# Altium PCB SurfaceDial_V1.2.1.PcbDoc
Units mm, origin at the board's own origin, x right, y up, seen from the top; angles counter-clockwise.
Board outline 44.2 x 43.65 mm, 2 copper layers (Top Layer, Bottom Layer); 22 components, 18 nets, 97 pads, 26 vias.
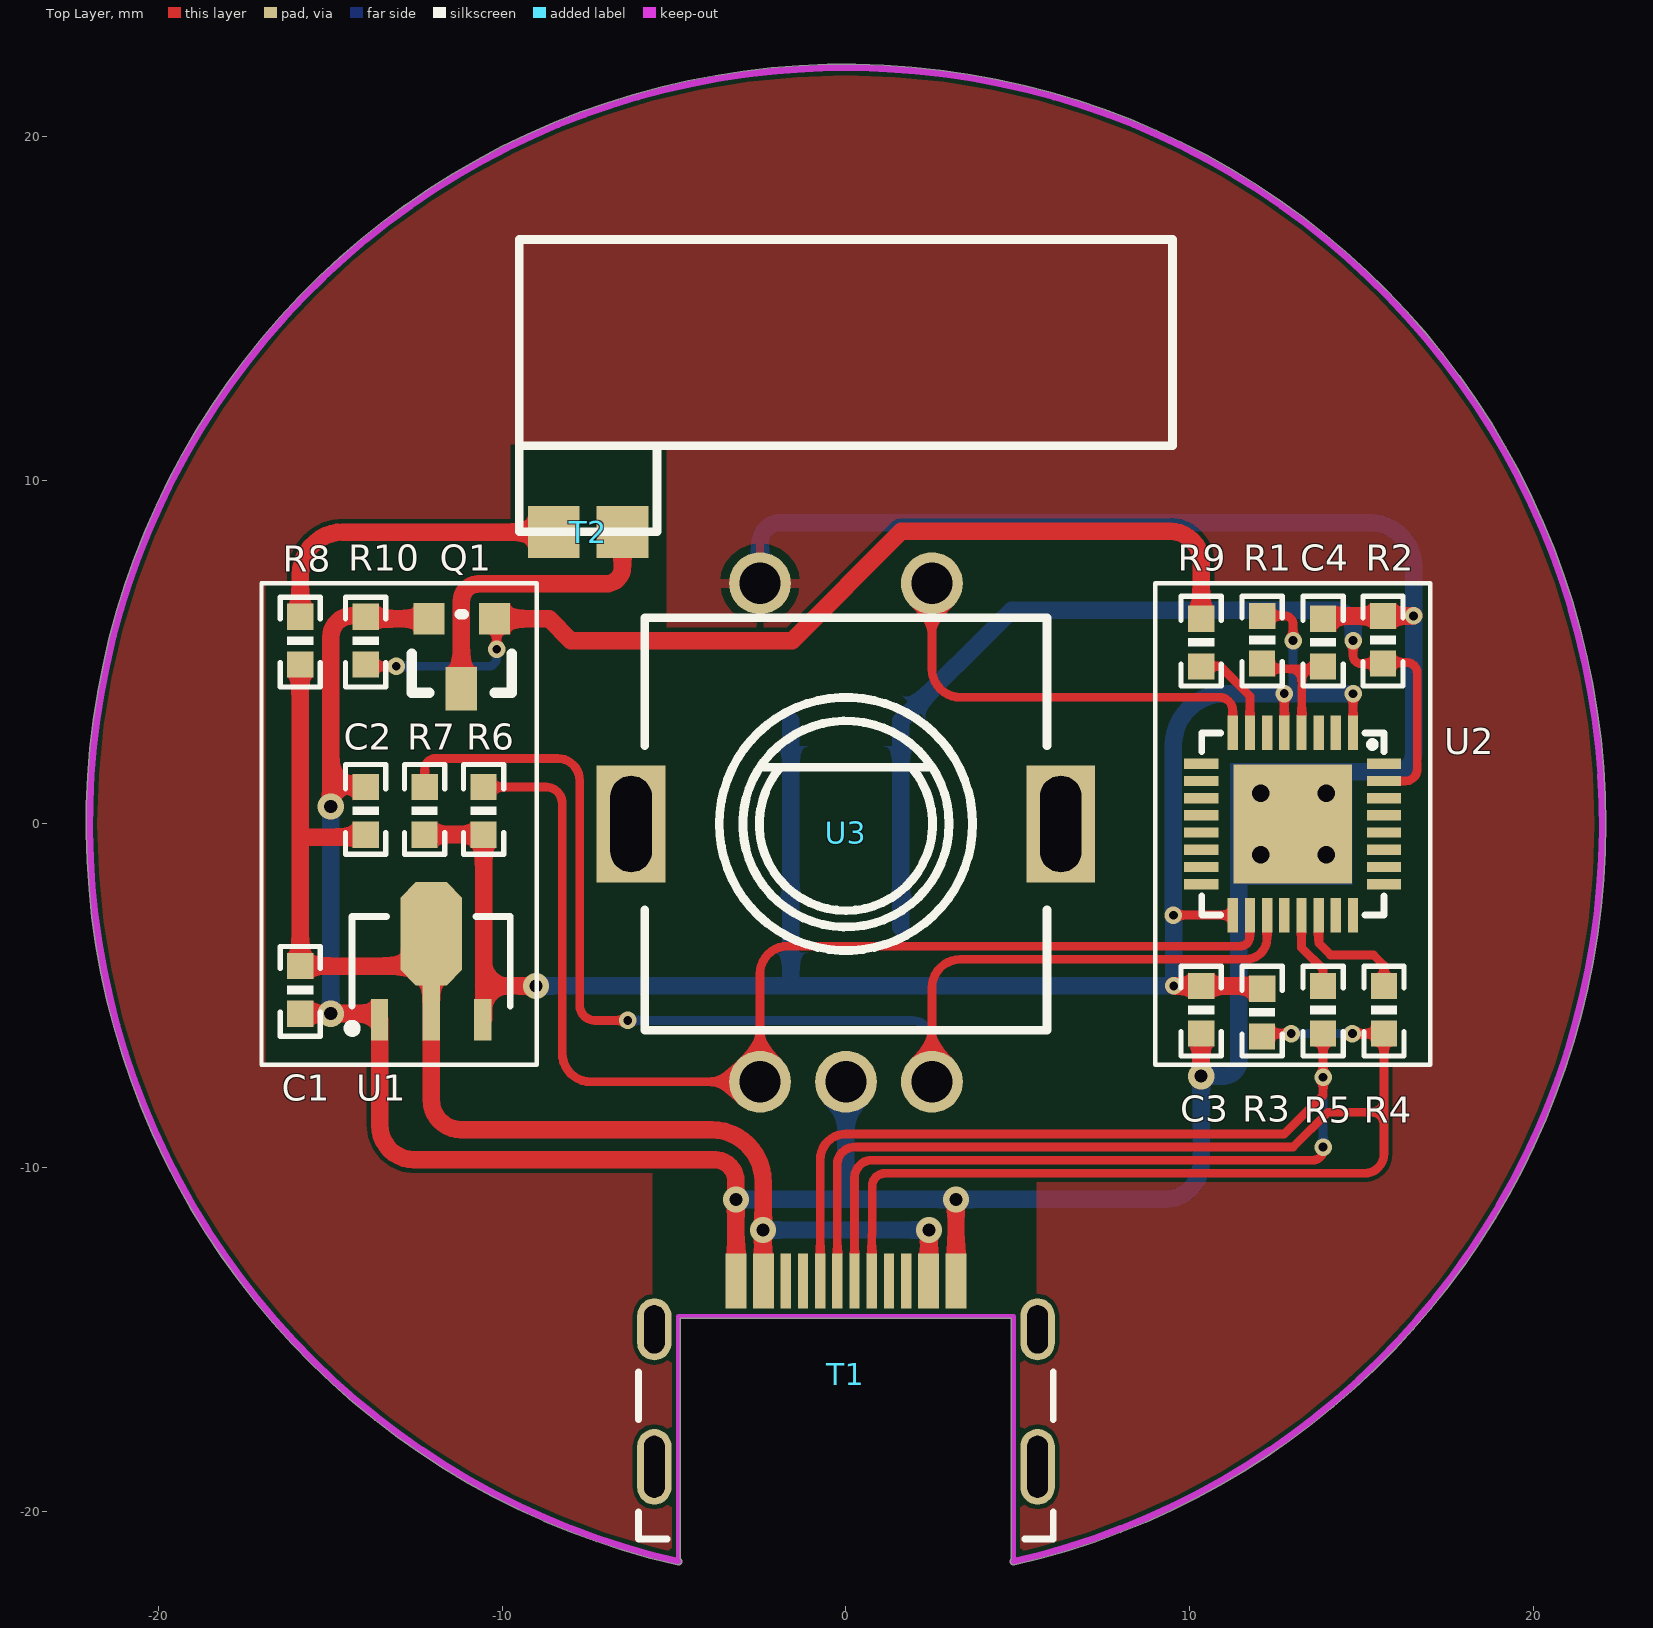
[diagram p0: Top Layer view]
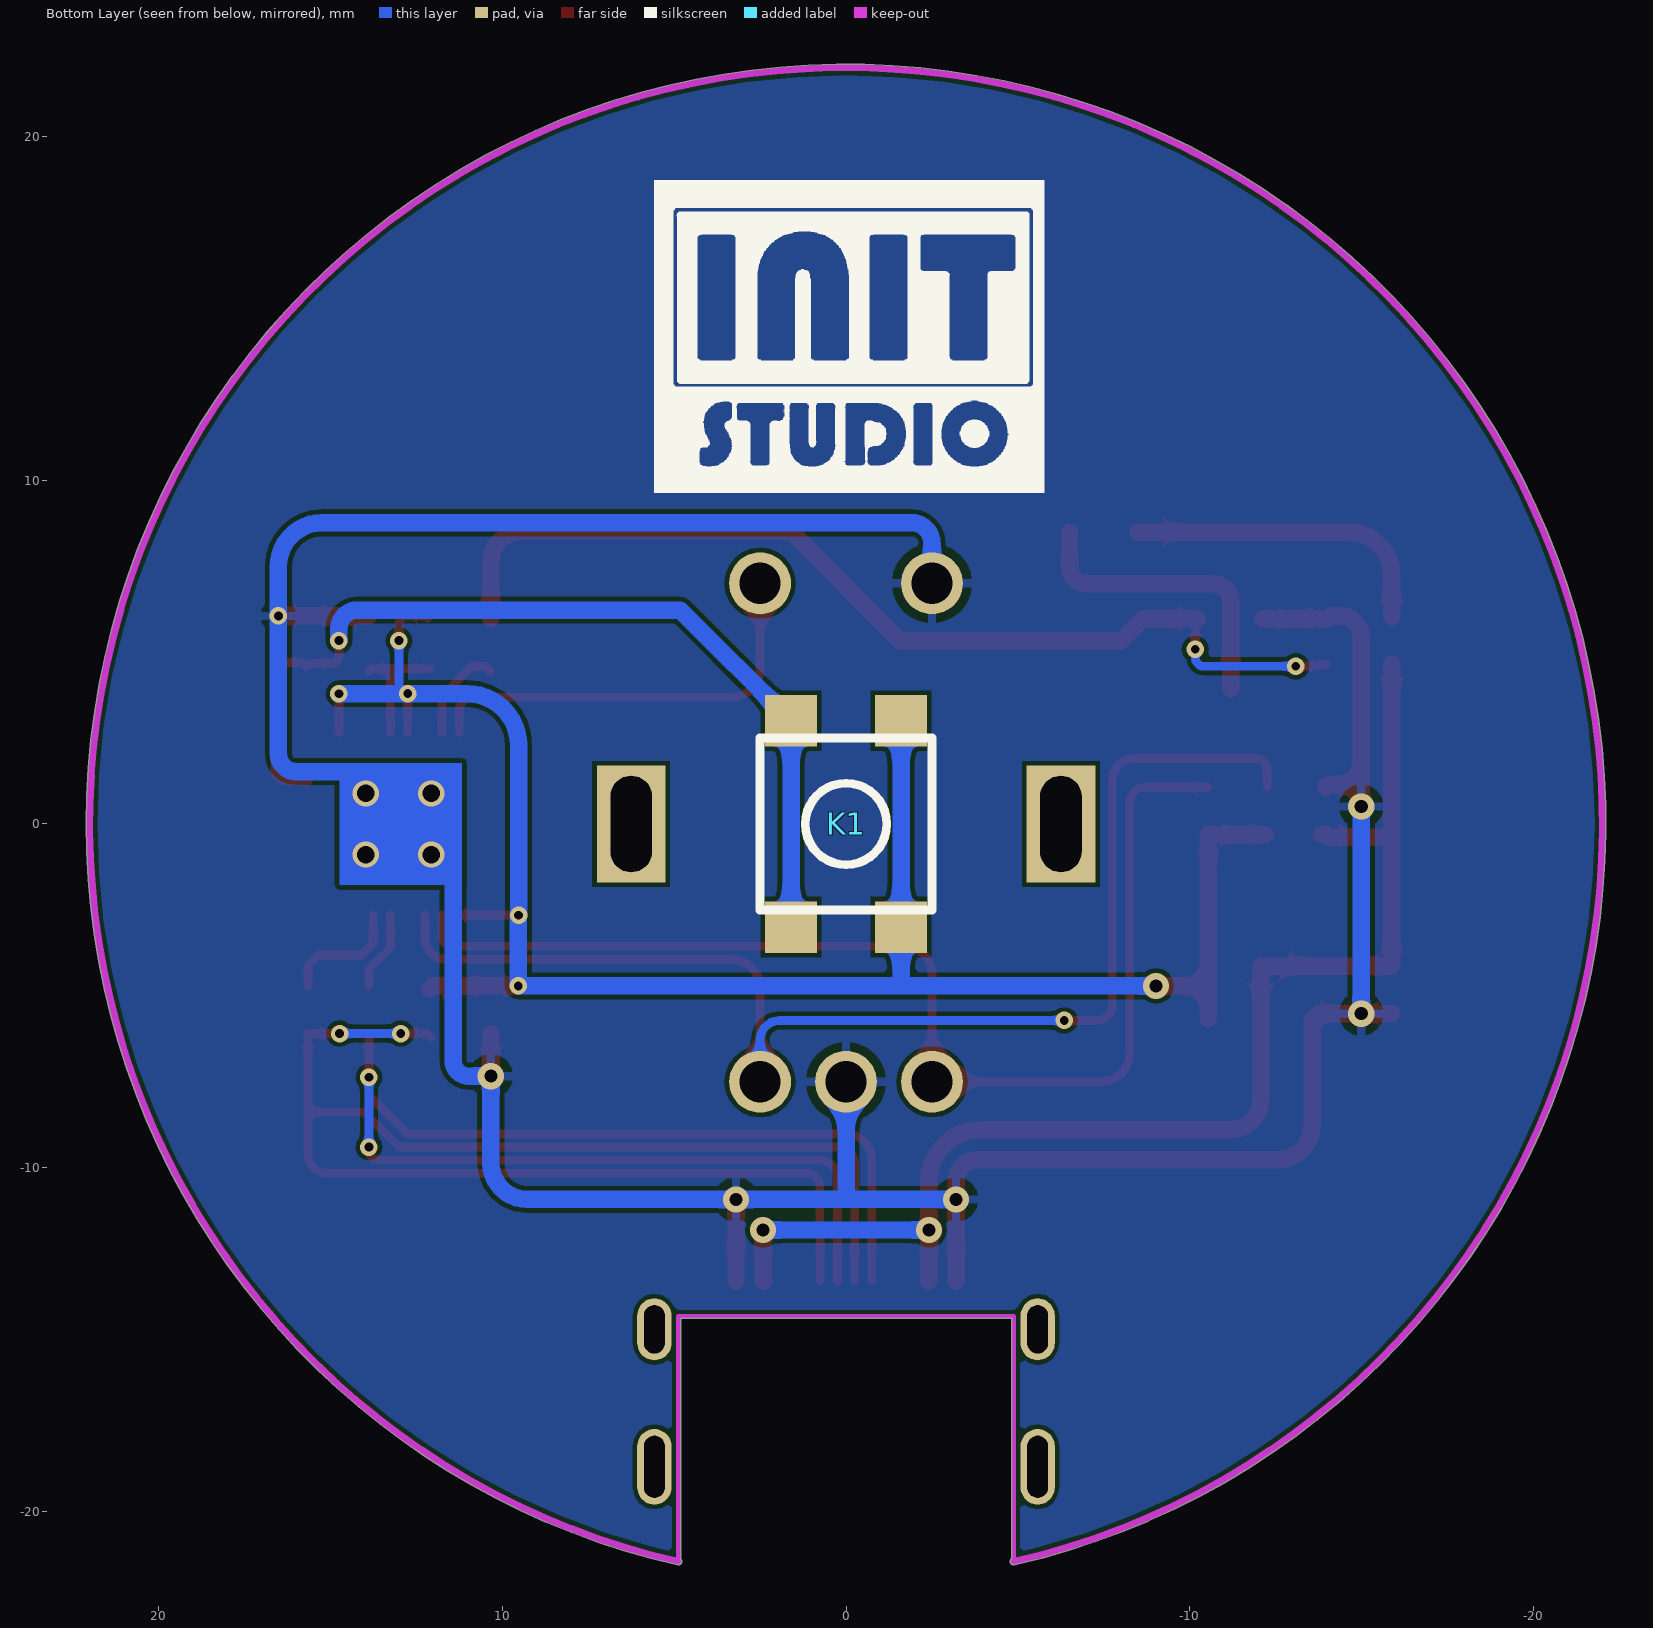
[diagram p1: Bottom Layer view, seen from below]
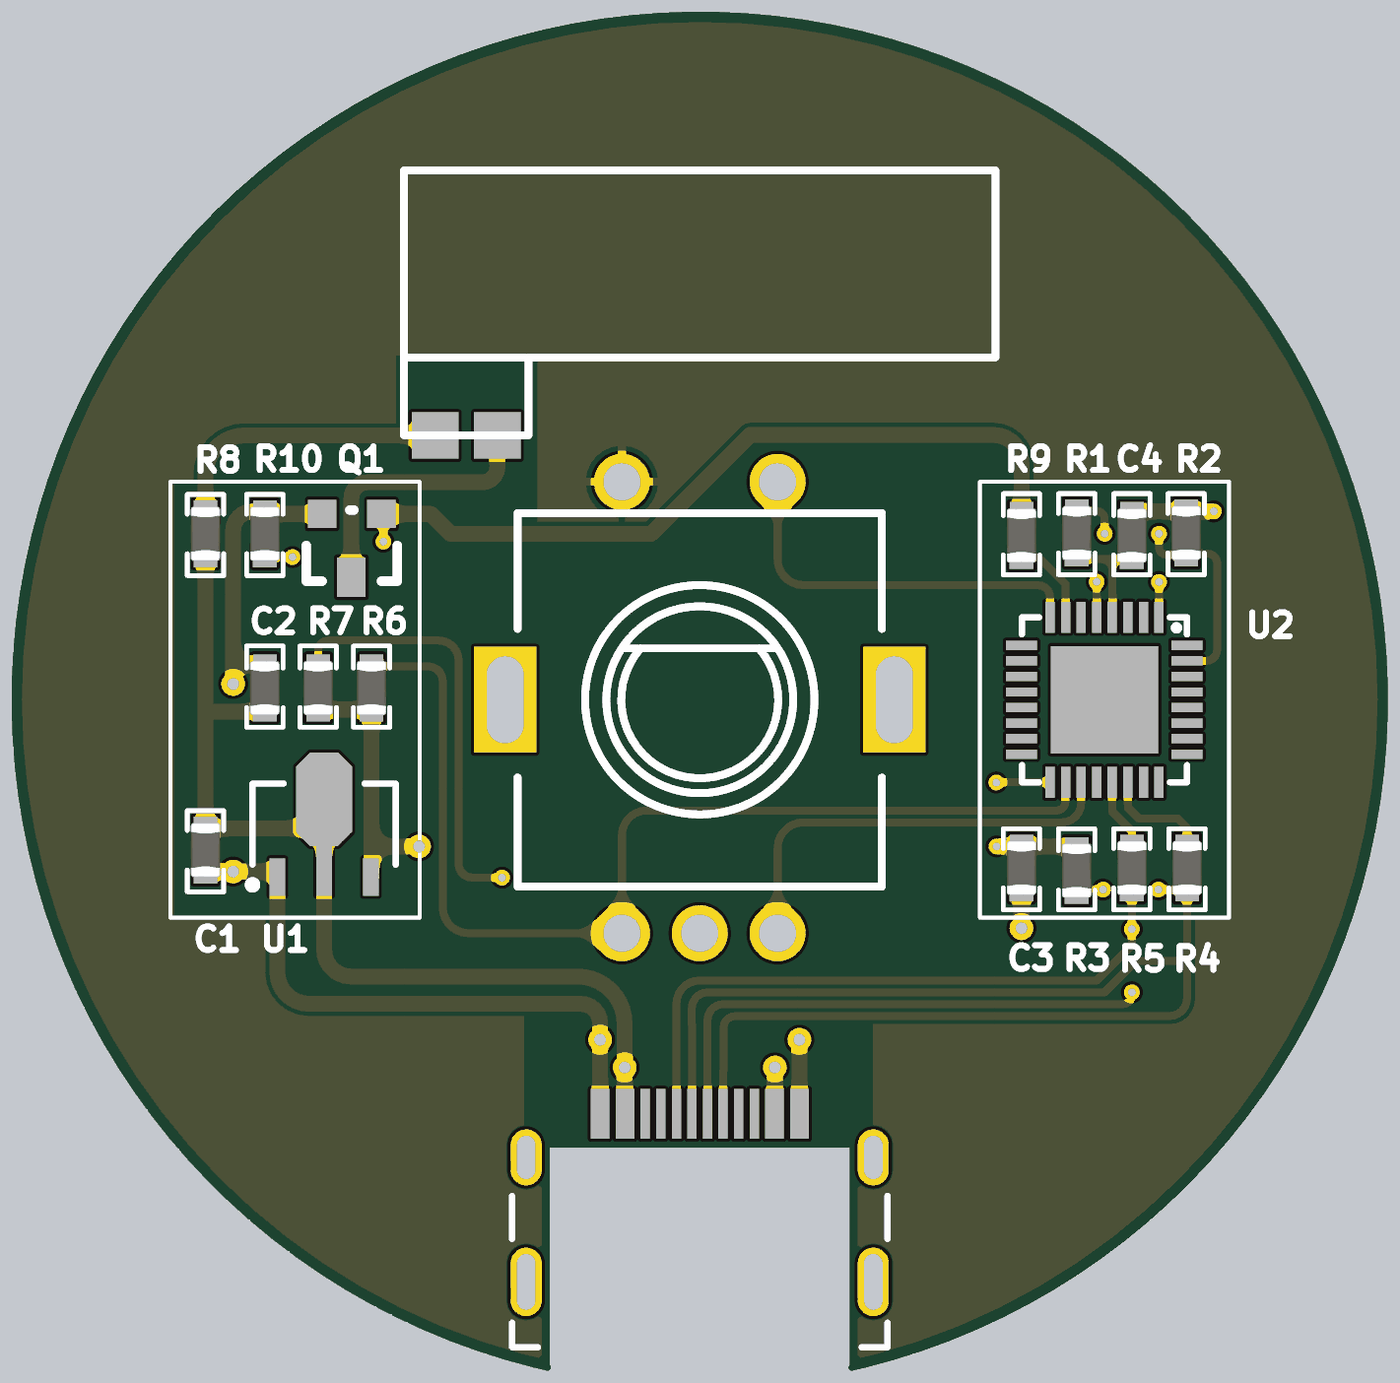
[diagram p2: 3D render of the assembled board from above, using the file's embedded part models]

## Layer stack, top to bottom
Top Solder: solder mask 0.0102, Solder Resist, Dk 3.5
Top Layer: signal copper 0.0356
Dielectric 1: dielectric 0.32, FR-4, Dk 4.8
Bottom Layer: signal copper 0.0356
Bottom Solder: solder mask 0.0102, Solder Resist, Dk 3.5

## Board outline
-4.901,-21.55 ccw(c-4.878,-21.452) -4.778,-21.452 ccw(c-4.878,-21.452) -4.815,-21.375 -4.815,-14.383 4.815,-14.383 4.815,-21.375 ccw(c4.878,-21.452) 4.901,-21.55 ccw(c0,0) 22.1,0 ccw(c0,0)

## Design rules (kind name [scope] priority, off if disabled: settings)
Clearance [All] p1: gap=0.127 ignorepadtopadclearanceinfootprint=FALSE
HoleSize [All] p1: absolutevalues=TRUE maxlimit=3 minlimit=0.025 maxpercent=80.000 minpercent=20.000
MinimumSolderMaskSliver [All] p1: minsoldermaskwidth=0.102
PolygonConnect [All] p1: connectstyle=Relief reliefconductorwidth=0.254 reliefentries=4 polygonreliefangle="90 Angle" airgapwidth=0.254
RoutingVias [All] p1: holewidth=0.254 width=0.508 viastyle="Through Hole" minholewidth=0.254 minwidth=0.508 maxholewidth=0.254 maxwidth=0.508
SilkToSilkClearance [All] p1: silktosilkclearance=0.127
SilkToSolderMaskClearance [IsPad] p1: minsilkscreentomaskgap=0.127 clearancetoexposedcopper=TRUE
SolderMaskExpansion [All] p1: expansion=0.102
Width [All] p1: maxlimit=2 minlimit=0.127 preferedwidth=0.254
26 further rules are at their usual default settings.

## Components (designator, comment, footprint, x,y, rotation, side; value= is the part's Value field where it differs from the comment)
C1 "CAP_0603" 0603 -15.875,-4.826 r90 top value=104
C2 "CAP_0603" 0603 -13.97,0.381 r270 top value=104
C3 "CAP_0603" 0603 10.333,-5.404 r90 top value=104
C4 "CAP_0603" 0603 13.878,5.277 r270 top value=104
Designator28 "Comment" "INIT - DUPLICATE" 92.202,88.773 r0 bottom
K1 "KEY" SW(5*5) 0,0 r180 bottom
Q1 "NPN" SOT-23 -11.176,4.953 r180 top
R1 "RES_0603" 0603 12.105,5.359 r90 top value=10K
R2 "RES_0603" 0603 15.621,5.359 r90 top value=10K
R3 "RES_0603" 0603 12.105,-5.486 r270 top value=1.5K
R4 "RES_0603" 0603 15.65,-5.404 r90 top value=22R
R5 "RES_0603" 0603 13.878,-5.404 r90 top value=22R
R6 "RES_0603" 0603 -10.541,0.381 r270 top value=10K
R7 "RES_0603" 0603 -12.255,0.381 r270 top value=10K
R8 "RES_0603" 0603 -15.875,5.334 r90 top value="0.5A 6V"
R9 "RES_0603" 0603 10.333,5.277 r270 top value=1K
R10 "RES_0603" 0603 -13.97,5.334 r90 top value=10K
T1 "Type-C16" "TYPE_C16 沉板" 0,-16 r0 top
T2 "电机触盘" MEIZU_M 0,14 r0 top
U1 "SGM2200-3.3YK3G" SOT-89-3 -12.065,-4.445 r90 top
U2 "STM32F042K6U6" UFQFPN32 13,0 r270 top
U3 "EC11" EC11E1820402 0,0 r0 top

## Footprints (in the part's own frame and the unit in brackets; to place one, negate y for a bottom-side part, rotate by r counter-clockwise, add the part's x,y. Pads: shape width x height; smd on the part's side, far side on the other; paste and mask are expansions set on the pad)
0603 [mil]
  rect 30x30 smd: 1(-27.25,0.03) 2(27.25,-0.03)
  silkscreen extent -53,-23 50,23, body extent -34,-19 34,19, height 35
EC11E1820402 [mm]
  rect 2x3.4 hole 1.2 slot 2.8 at 90 deg: 0(-6.25,0) 0(6.25,0)
  round 1.8 hole 1.2: 1(-2.5,-7.5) 2(0,-7.5) 3(2.5,-7.5) 4(2.5,7) 5(-2.5,7)
  silkscreen extent -5.85,-6 5.85,6
"INIT - DUPLICATE" [mm]
  silkscreen extent -97.97,70.06 -86.62,79.14
MEIZU_M [mm]
  rect 1.5x1.5 smd: 1(-8.5,-5.508) 2(-6.5,-5.508)
  silkscreen extent -9.5,-5.5 9.5,3, body extent -9.51,-5.49 9.51,3, height 3
SOT-23 [mil]
  rect 36x36 smd: 1(-37.5,-40) 2(37.5,-40)
  rect 36x50 smd: 3(0.5,40)
  silkscreen extent -58,-45 58,45, body extent -58,-25 60,45, height 43
SOT-89-3 [mm]
  rect 1.2x0.5 smd: 1(-1.25,1.5) 3(-1.25,-1.5)
  rect 1.6x0.5 smd: 2(-1.05,0)
  oct 3x1.8 smd: 2(1.25,0)
  silkscreen extent -1.62,-2.3 1.75,2.42, body extent -0.85,-2.3 1.75,2.3, height 1.6
SW(5*5) [mm]
  rect 1.5x1.5 smd: 1(-1.6,-3) 1(-1.6,3) 2(1.6,-3) 2(1.6,3)
  silkscreen extent -2.5,-2.5 2.5,2.5, body extent -2.57,-2.56 2.51,2.51, height 0.51
"TYPE_C16 沉板" [mm] "16pin"
  oval 1x2.2 hole 0.6 slot 1.8 at 90 deg: 0(-5.575,-2.7) 0(5.575,-2.7)
  oval 1x1.8 hole 0.6 slot 1.4 at 90 deg: 0(-5.575,1.3) 0(5.575,1.3)
  rect 0.6x1.6 smd: 1(3.2,2.7) 2(2.4,2.7) 11(-2.4,2.7) 12(-3.2,2.7)
  rect 0.3x1.6 smd: 3(1.75,2.7) 4(1.25,2.7) 5(0.75,2.7) 6(0.25,2.7) 7(-0.25,2.7) 8(-0.75,2.7) 9(-1.25,2.7) 10(-1.75,2.7)
  silkscreen extent -6.03,-4.8 6.03,0.06
UFQFPN32 [mm]
  rect 3.45x3.45 smd: 0(0,0)
  rect 1x0.3 smd: 1(-2.65,1.75) 2(-2.65,1.25) 3(-2.65,0.75) 4(-2.65,0.25) 5(-2.65,-0.25) 6(-2.65,-0.75) 7(-2.65,-1.25) 8(-2.65,-1.75) 17(2.65,-1.75) 18(2.65,-1.25) 19(2.65,-0.75) 20(2.65,-0.25) 21(2.65,0.25) 22(2.65,0.75) 23(2.65,1.25) 24(2.65,1.75)
  rect 0.3x1 smd: 9(-1.75,-2.667) 10(-1.25,-2.667) 11(-0.75,-2.667) 12(-0.25,-2.667) 13(0.25,-2.667) 14(0.75,-2.667) 15(1.25,-2.667) 16(1.75,-2.667) 25(1.75,2.65) 26(1.25,2.65) 27(0.75,2.65) 28(0.25,2.65) 29(-0.25,2.65) 30(-0.75,2.65) 31(-1.25,2.65) 32(-1.75,2.65)
  silkscreen extent -2.65,-2.65 2.65,2.65, body extent -2.64,-2.64 2.64,2.64, height 0.25

## Part data
C1 C2 C3 C4 R1 R2 R3 R4 R5 R6 R7 R8 R9 R10: Package=SMT

## Via types
v1: diameter 0.508, hole 0.254, Top Layer to Bottom Layer, 14 vias
v2: diameter 0.762, hole 0.381, Top Layer to Bottom Layer, 8 vias
v3: diameter 0.762, hole 0.508, Top Layer to Bottom Layer, 4 vias

## Nets (pads, with @x,y where several pads share a name; then routed paths per layer and width w, separated by ;. In a path a pad name is that pad's centre, name@x,y a point inside that pad or via, vN(x,y) a via of type N, cw(c..) or ccw(c..) an arc to the next point about the centre after c; other vN are vias at no path point)
EC_A: R6.1 U2.18 U3.1 | length 34.7
  Top Layer w0.254: R6.1 -8.724,1.073 cw(c-8.724,0.604) -8.255,0.604 -8.255,-6.665 ccw(c-7.42,-6.665) -7.42,-7.5 U3.1 -2.5,-4.354 cw(c-1.702,-4.354) -1.702,-3.556 11.47,-3.556 ccw(c11.47,-3.284) 11.742,-3.284 11.742,-2.658 U2.18
EC_B: R7.1 U2.19 U3.3 | length 38.1
  Top Layer w0.254: R7.1 -12.255,1.588 cw(c-11.938,1.588) -11.938,1.905 -8.382,1.905 cw(c-8.382,1.27) -7.747,1.27 -7.747,-5.27 ccw(c-7.302,-5.27) -7.302,-5.715 v1(-6.35,-5.715) ; U3.3 2.5,-4.768 cw(c3.331,-4.768) 3.331,-3.937 11.631,-3.937 ccw(c11.631,-3.318) 12.25,-3.318 U2.19
  Bottom Layer w0.254: v1(-6.35,-5.715) 1.926,-5.715 cw(c1.926,-6.289) 2.5,-6.289 U3.3
EC_S: U2.8 U3.4 | length 12.6
  Top Layer w0.254: U3.4 2.5,4.514 ccw(c3.331,4.514) 3.331,3.683 10.864,3.683 cw(c10.864,3.297) 11.25,3.297 U2.8
GND: C1.1 C2.1 C3.1 C4.1 Q1.2 R2.2 R10.2 T1.1 T1.12 U1.1 U2.0 U3.2 U3.5 | length 98.5
  Top Layer w0.508: C1.1 v2(-14.986,-5.518) -13.742,-5.518 U1.1 -13.565,-8.756 ccw(c-12.554,-8.756) -12.554,-9.767 -3.822,-9.767 cw(c-3.822,-10.389) -3.2,-10.389 v2(-3.2,-10.922) T1.12 ; v2(-14.986,0.508) -14.986,1.143 ; C2.1 ccw(c-14.039,1.073) -14.039,1.143 -14.986,1.143 ; Q1.2 -12.954,5.969 -14.013,5.969 -14.095,6.052 -14.37,6.052 ccw(c-14.37,5.436) -14.986,5.436 -14.986,1.143 ; U3.2@-0.127,-8.001 0,-7.874 U3.2 ; T1.1 v2(3.2,-10.922) ; v2(10.332,-7.337) C3.1 ; C4.1@13.878,6.052 R2.2 v1(16.51,6.052)
  Bottom Layer w0.508: v2(-14.986,-5.518) v2(-14.986,0.508) ; v2(-3.2,-10.922) 0.051,-10.922 ; U3.5 -2.5,8.168 cw(c-1.905,8.168) -1.905,8.763 15.24,8.763 cw(c15.24,7.493) 16.51,7.493 v1(16.51,6.052) 16.51,2.032 cw(c16.002,2.032) 16.002,1.524 14.605,1.524 v3(13.97,0.889) ; U3.2 0,-10.871 0.051,-10.922 ; 11.43,-1.397 11.43,-6.883 cw(c10.977,-6.883) 10.977,-7.337 v2(10.332,-7.337) 10.332,-9.861 cw(c9.271,-9.861) 9.271,-10.922 v2(3.2,-10.922) 0.051,-10.922
  other v3: 12.065,-0.889 13.97,-0.889 12.065,0.889
GPIO_M: R9.2 U2.7 | length 2.9
  Top Layer w0.254: R9.2@10.332,4.432 10.485,4.585 10.884,4.585 11.75,3.719 U2.7
M0: Q1.3 T2.2 | length 8.8
  Top Layer w0.508: Q1.3 -11.189,6.477 cw(c-10.681,6.477) -10.681,6.985 -6.985,6.985 ccw(c-6.985,7.47) -6.5,7.47 T2.2
M1: R8.2 T2.1 | length 9.3
  Top Layer w0.508: R8.2 -15.874,7.24 cw(c-14.622,7.24) -14.622,8.492 T2.1
MCU_RST: C4.2 R1.1 U2.4 | length 3.7
  Top Layer w0.254: R1.1@12.105,4.515 13.258,4.515 ; U2.4@13.258,2.658 U2.4 13.25,2.921 13.258,2.929 13.258,4.515 ; C4.2@13.877,4.432 13.794,4.515 13.258,4.515
NetK1_1: K1.1 R2.1 U2.31 | length 27.6
  Top Layer w0.254: v1(14.75,5.334) 14.75,4.891 ccw(c14.974,4.891) 14.974,4.667 R2.1@15.595,4.667 ; U2.31 16.27,1.25 ccw(c16.27,1.597) 16.617,1.597 16.617,4.387 ccw(c16.305,4.387) 16.305,4.699 15.833,4.699 R2.1@15.711,4.577
  Bottom Layer w0.508: K1.1@1.6,-3 1.6,3 4.823,6.223 14.211,6.223 cw(c14.211,5.684) 14.75,5.684 v1(14.75,5.334)
NetQ1_1: Q1.1 R9.1 R10.1 | length 29.4
  Top Layer w0.254: R10.1 -13.773,4.642 -13.716,4.585 v1(-13.081,4.585) ; Q1.1 -10.16,5.905 v1(-10.16,5.08)
  Top Layer w0.508: Q1.1 -8.636,5.969 -8.001,5.334 -1.561,5.334 1.614,8.509 9.43,8.509 cw(c9.43,7.606) 10.334,7.606 R9.1
  Bottom Layer w0.254: v1(-13.081,4.585) -10.414,4.585 ccw(c-10.414,4.839) -10.16,4.839 v1(-10.16,5.08)
NetR3_2: R3.2 R4.1 T1.5 T1.7 | length 45.3
  Top Layer w0.254: T1.7 -0.25,-10.441 -0.254,-10.441 -0.254,-9.906 cw(c0.254,-9.906) 0.254,-9.398 13.004,-9.398 14.02,-8.382 15.649,-8.382 ; T1.5 0.75,-11.95 0.762,-11.938 0.762,-10.541 cw(c1.143,-10.541) 1.143,-10.16 15.086,-10.16 ccw(c15.086,-9.597) 15.649,-9.597 15.649,-8.382 ; R3.2@12.065,-6.218 R3.2 12.187,-6.096 v1(12.954,-6.096) ; v1(14.732,-6.096) R4.1 15.649,-8.382
  Bottom Layer w0.254: v1(12.954,-6.096) v1(14.732,-6.096)
NetR5_1: R5.1 T1.6 T1.8 | length 40.1
  Top Layer w0.254: T1.8 -0.75,-9.767 cw(c0,-9.767) 0,-9.017 12.75,-9.017 13.878,-7.889 v1(13.878,-7.366) 13.878,-6.098 R5.1 ; T1.6 0.25,-10.287 cw(c0.758,-10.287) 0.758,-9.779 13.589,-9.779 ccw(c13.589,-9.49) 13.878,-9.49 v1(13.878,-9.398)
  Bottom Layer w0.254: v1(13.878,-9.398) v1(13.878,-7.366)
SWCLK: U2.24
SWDIO: U2.23
USB_DN: R5.2 U2.21 | length 2.3
  Top Layer w0.254: U2.21 13.25,-3.598 13.878,-4.226 R5.2
USB_DP: R4.2 U2.22 | length 3.6
  Top Layer w0.254: U2.22 13.75,-3.463 14.097,-3.81 15.346,-3.81 15.651,-4.115 R4.2
VBUS: C1.2 C2.2 R8.1 T1.2 T1.11 U1.2 | length 38.8
  Top Layer w0.508: R8.1 -15.876,2.034 -15.874,2.032 -15.874,-0.311 ; C2.2@-13.844,-0.311 C2.2 -14.041,-0.381 -15.804,-0.381 -15.874,-0.311 ; T1.11 -2.413,-13.287 v2(-2.413,-11.811) -2.413,-10.401 ccw(c-3.924,-10.401) -3.924,-8.89 -11.198,-8.89 cw(c-11.198,-8.023) -12.065,-8.023 -12.065,-5.495 -12.065,-4.134 C1.2 -15.876,-4.132 -15.874,-4.131 -15.874,-0.311 ; T1.2 2.413,-13.287 v2(2.413,-11.811)
  Bottom Layer w0.508: v2(-2.413,-11.811) v2(2.413,-11.811)
VDD: C3.2 K1.2 R1.2 R3.1 R6.2 R7.2 U1.3 U2.1 U2.5 U2.17 | length 57.7
  Top Layer w0.254: U1.3 U1.3@-10.542,-5.672 ; v1(9.525,-2.658) 9.533,-2.65 U2.17 ; R1.2@12.176,5.982 R1.2 12.772,6.052 cw(c12.772,5.819) 13.005,5.819 v1(13.005,5.334) ; U2.5 v1(12.75,3.792) ; U2.1 v1(14.75,3.785)
  Top Layer w0.508: R7.2@-12.193,-0.311 R6.2 -10.542,-4.712 ; U1.3@-10.542,-5.672 -10.542,-4.712 ; v2(-9.017,-4.712) -10.542,-4.712 ; v1(9.533,-4.712) C3.2 12.024,-4.712 R3.1
  Bottom Layer w0.254: v1(9.525,-2.658) v1@9.533,-2.666 ; v1(13.005,5.334) 13.005,3.912 13.106,3.81
  Bottom Layer w0.508: v2(-9.017,-4.712) -1.524,-4.712 ; K1.2@-1.6,3 -1.6,-3 -1.6,-4.636 -1.524,-4.712 ; v1(9.525,-2.658) 9.525,2.286 cw(c11.031,2.286) 11.031,3.792 v1(12.75,3.792) 14.743,3.792 v1(14.75,3.785) ; v1@9.533,-2.666 v1(9.533,-4.712) -1.524,-4.712
pads on no net: T1.0 T1.3 T1.4 T1.9 T1.10 U2.2 U2.3 U2.6 U2.9 U2.10 U2.11 U2.12 U2.13 U2.14 U2.15 U2.16 U2.20 U2.25 U2.26 U2.27 U2.28 U2.29 U2.30 U2.32 U3.0

## Polygon pours and split planes (outlines as drawn)
GND on Top Layer " " (solid, remove dead copper, pour order 22): -24.206,23.52 -24.206,-22.225 23.546,-22.225 23.546,23.52
GND on Bottom Layer " " (solid, remove dead copper, pour order 24): -23.978,23.952 -23.978,-22.657 24.714,-22.657 24.714,24.206

## Keep-outs
Keep-Out Layer:
  lines w0.127: -4.878,-21.452 -4.878,-14.319 4.878,-14.319 4.878,-21.452
  lines w0.2: -4.878,-21.452 cw(c0,0) 4.878,-21.452

## Other copper
Top Layer:
  pour cut-out: 9.017,-7.028 9.017,-8.756 14.098,-8.756 14.098,-7.028
  pour cut-out: -9.759,11.049 -9.759,5.08 -5.207,5.08 -5.207,11.049
  pour cut-out: -9.017,6.985 -9.024,-6.998 -9.054,-7.028 -16.891,-7.028 -16.891,6.985
  pour cut-out: 9.021,7 9.017,6.996 9.017,-7.028 17.018,-7.028 17.003,-7.013 17.003,6.985
  pour cut-out: -5.635,-3.492 -5.635,-14.055 5.555,-14.055 5.555,-3.377
Bottom Layer:
  rectangle net GND: 11.176,-1.778 14.732,1.778

## Silkscreen, mask and mechanical layers (free items; w line width, h text height)
Top Overlay:
  lines w0.127: -17,-7 -9,-7 -9,7 -17,7 -17,-7 ; 9,-7 17,-7 17,7 9,7 9,-7
Mechanical 1:
  circle w0.2: c14,-12 r1.5
  circle w0.2: c-14,-12 r1.5
  circle w0.2: c14,12 r1.5
  circle w0.2: c-14,12 r1.5
  lines w0.15: -4.878,-21.452 -4.875,-21.449 -4.875,-14.3 ; 4.875,-14.3 4.875,-21.449 4.878,-21.452
  lines w0.2: -4.878,-21.452 cw(c0,0) 4.878,-21.452